# EAGLE board fpga_shield (EAGLE 9.1.2), part 1 of 2
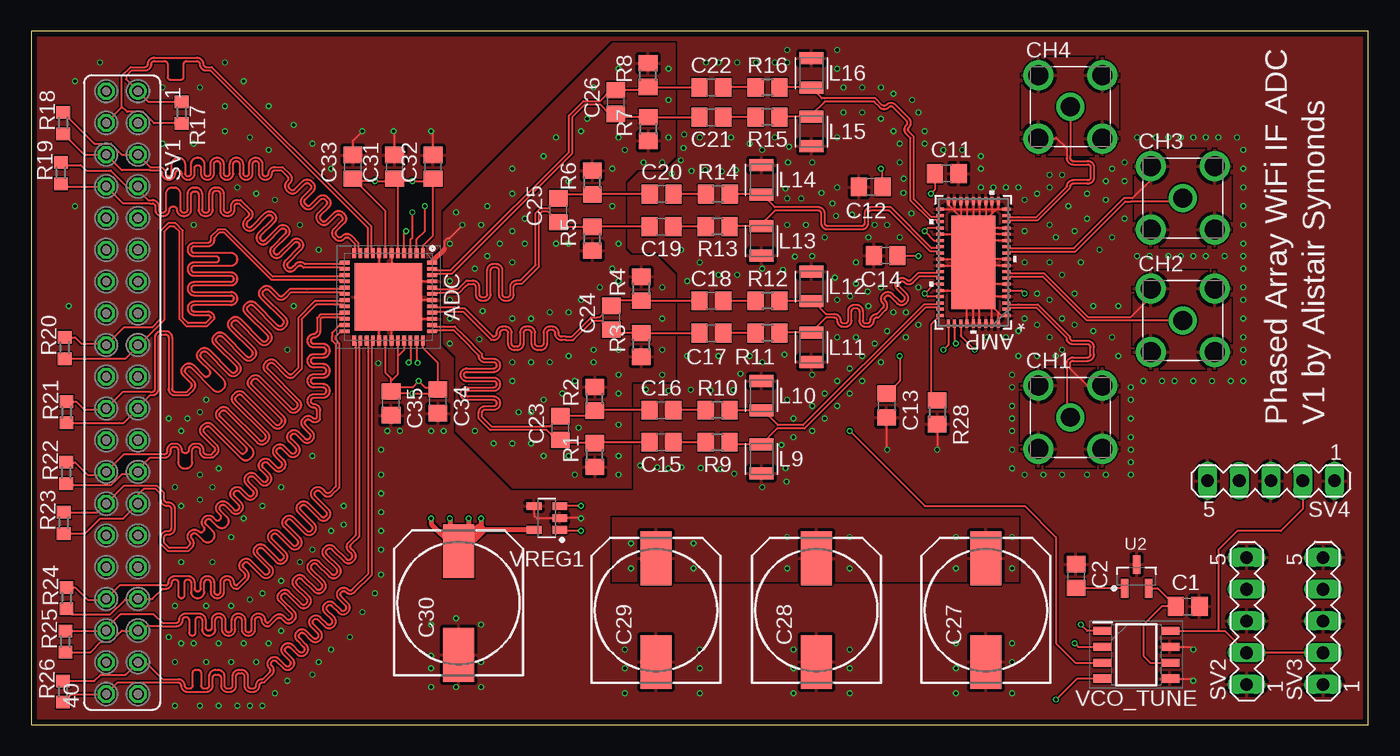
[diagram p0: board, top side]
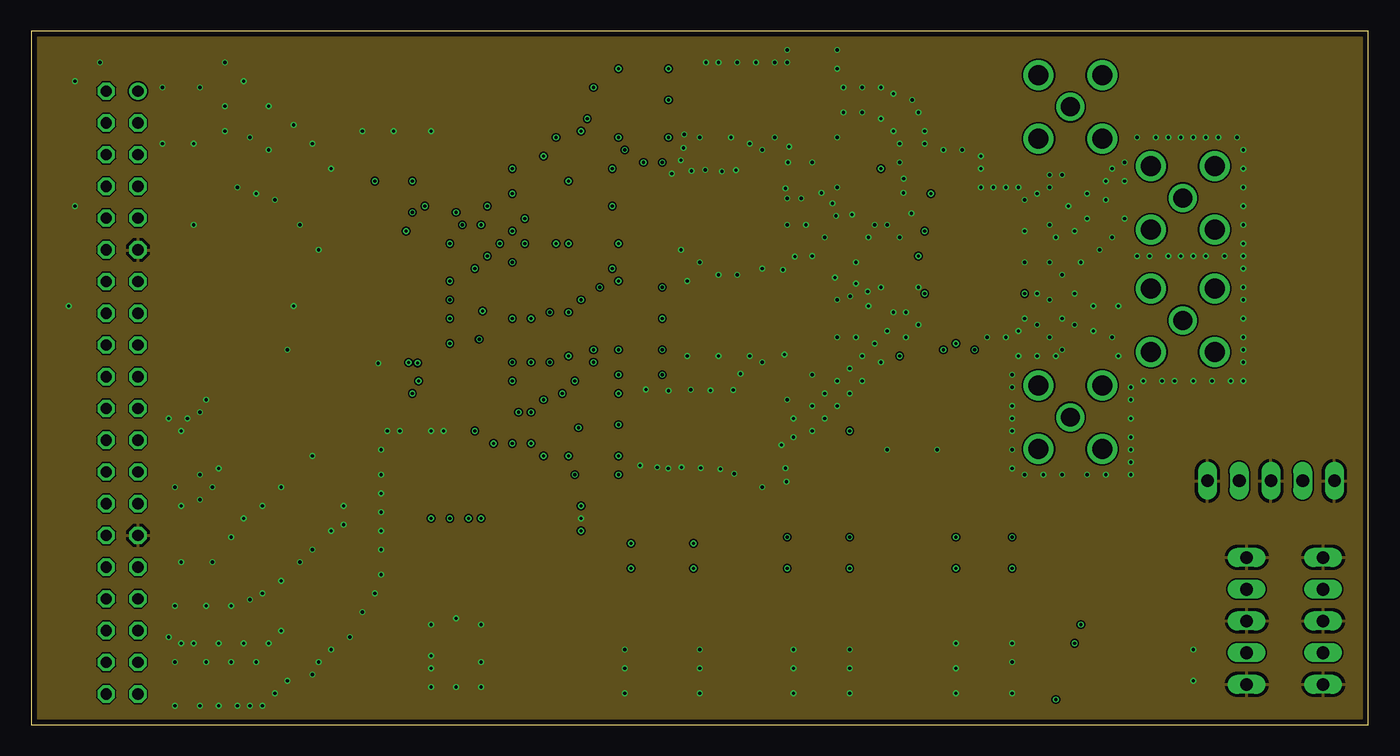
[diagram p1: board, inner layer Route2]
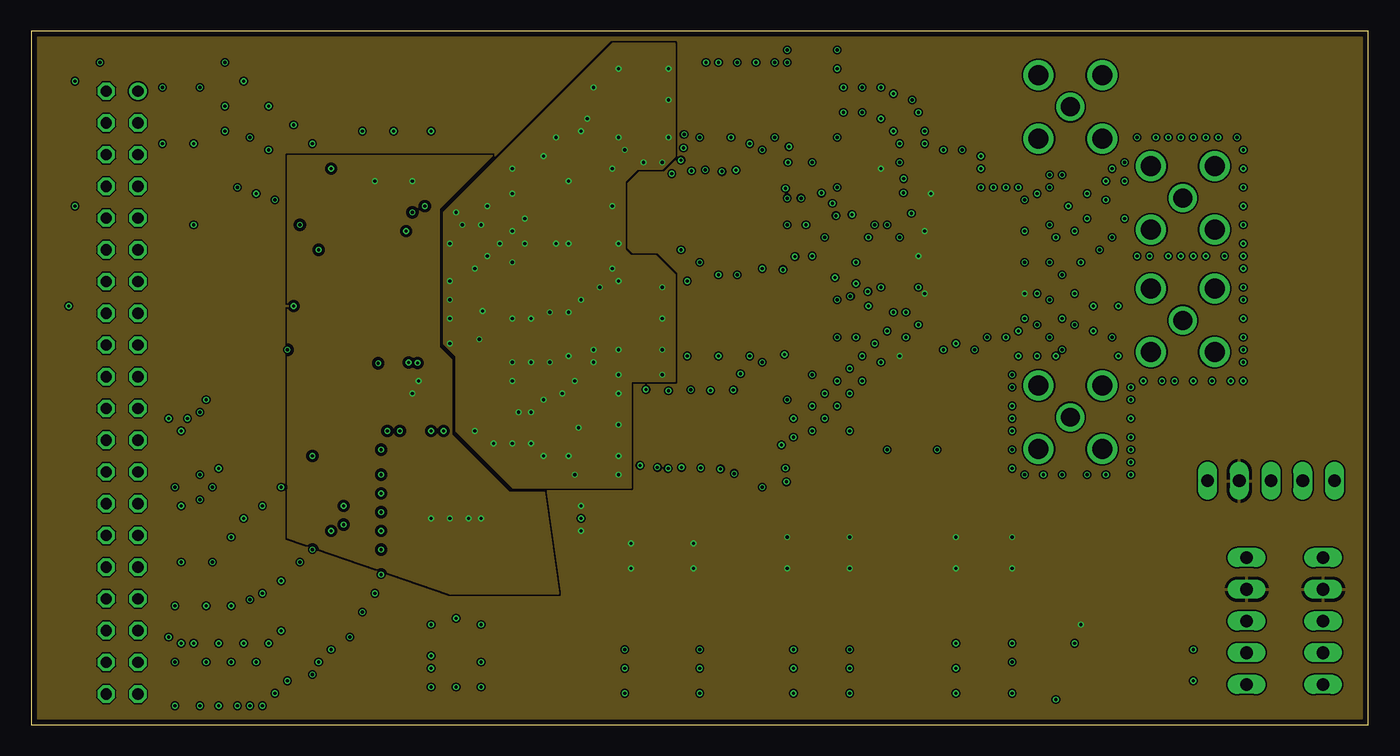
[diagram p2: board, inner layer Route15]
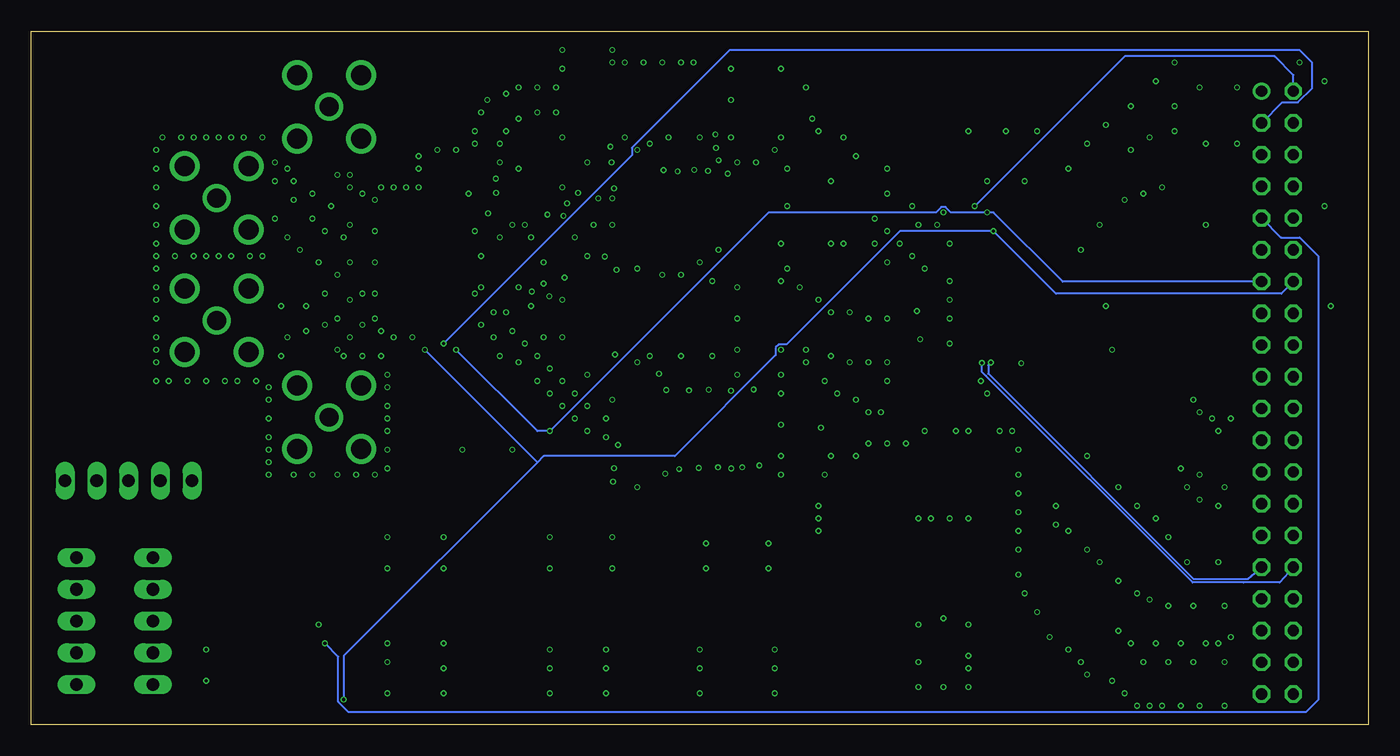
[diagram p3: board, bottom side, seen from below]

Size 107 x 55.5 mm. Coordinates in mm from the lower left corner, seen from the top.
Outline: 0,0 107,0 107,55.5 0,55.5 0,0
Copper layers (1*2*15*16): Top 0.035559375mm / dielectric 0.17018125mm / Route2 0.01778125mm / dielectric 47mil / Route15 0.01778125mm / dielectric 0.17018125mm / Bottom 0.035559375mm
Design rules "oshpark_4layer": minimum track width 5mil, minimum drill 10mil, track to track 5mil, track to pad 5mil, pad to pad 5mil, via to via 5mil, smd to smd 5mil, copper to edge 15mil, drill to drill 6mil, minimum pad ring 4mil, minimum via ring 4mil, stop-mask expansion 2.5mil, vias tented up to drill 0mil, thermal gap 10mil
Net classes: 1 digital_diff: width 0.15 mm; 2 analog_diff: width 0.15 mm

## Footprints (pad centres in the part's own frame; a part is rotated, then mirrored left to right if it is on the bottom)
QFN50P700X700X100-49N = smd 0.8 x 0.3: 1 -3.5,2.75; 2 -3.5,2.25; 3 -3.5,1.75; 4 -3.5,1.25; 5 -3.5,0.75; 6 -3.5,0.25; 7 -3.5,-0.25; 8 -3.5,-0.75; 9 -3.5,-1.25; 10 -3.5,-1.75; 11 -3.5,-2.25; 12 -3.5,-2.75; 25 3.5,-2.75; 26 3.5,-2.25; 27 3.5,-1.75; 28 3.5,-1.25; 29 3.5,-0.75; 30 3.5,-0.25; 31 3.5,0.25; 32 3.5,0.75; 33 3.5,1.25; 34 3.5,1.75; 35 3.5,2.25; 36 3.5,2.75 | smd 0.3 x 0.8: 13 -2.75,-3.5; 14 -2.25,-3.5; 15 -1.75,-3.5; 16 -1.25,-3.5; 17 -0.75,-3.5; 18 -0.25,-3.5; 19 0.25,-3.5; 20 0.75,-3.5; 21 1.25,-3.5; 22 1.75,-3.5; 23 2.25,-3.5; 24 2.75,-3.5; 37 2.75,3.5; 38 2.25,3.5; 39 1.75,3.5; 40 1.25,3.5; 41 0.75,3.5; 42 0.25,3.5; 43 -0.25,3.5; 44 -0.75,3.5; 45 -1.25,3.5; 46 -1.75,3.5; 47 -2.25,3.5; 48 -2.75,3.5 | smd 5.4 x 5.4: 49 0,0
SQA54A = smd 0.61 x 0.254: 1 -2.654,4.25; 2 -2.654,3.75; 3 -2.654,3.25; 4 -2.654,2.75; 5 -2.654,2.25; 6 -2.654,1.75; 7 -2.654,1.25; 8 -2.654,0.75; 9 -2.654,0.25; 10 -2.654,-0.25; 11 -2.654,-0.75; 12 -2.654,-1.25; 13 -2.654,-1.75; 14 -2.654,-2.25; 15 -2.654,-2.75; 16 -2.654,-3.25; 17 -2.654,-3.75; 18 -2.654,-4.25; 28 2.654,-4.25; 29 2.654,-3.75; 30 2.654,-3.25; 31 2.654,-2.75; 32 2.654,-2.25; 33 2.654,-1.75; 34 2.654,-1.25; 35 2.654,-0.75; 36 2.654,-0.25; 37 2.654,0.25; 38 2.654,0.75; 39 2.654,1.25; 40 2.654,1.75; 41 2.654,2.25; 42 2.654,2.75; 43 2.654,3.25; 44 2.654,3.75; 45 2.654,4.25 | smd 0.254 x 0.61: 19 -2,-4.902; 20 -1.5,-4.902; 21 -1,-4.902; 22 -0.5,-4.902; 23 0,-4.902; 24 0.5,-4.902; 25 1,-4.902; 26 1.5,-4.902; 27 2,-4.902; 46 2,4.902; 47 1.5,4.902; 48 1,4.902; 49 0.5,4.902; 50 0,4.902; 51 -0.5,4.902; 52 -1,4.902; 53 -1.5,4.902; 54 -2,4.902 | smd 3.531 x 7.493: 55 0,0
C0805 = smd 1.3 x 1.5: 1 -0.95,0; 2 0.95,0
150CLZ-1010 = smd 4.3 x 2.5: + 4.15,0; - -4.15,0
TE_5-1814832-1 = drill 1.5: 1 0,0 | drill 1.6: 2 -2.54,2.54; 3 2.54,2.54; 4 -2.54,-2.54; 5 2.54,-2.54
INDC2518X180 = smd 0.962 x 1.912: 1 -1.175,0; 2 1.175,0
R0805 = smd 1.3 x 1.5: 1 -0.95,0; 2 0.95,0
R0603 = smd 1 x 1.1: 1 -0.85,0; 2 0.85,0
FE20-2 = drill 0.914: 1 -24.13,1.27 | drill 0.914 octagon: 2 -24.13,-1.27; 3 -21.59,1.27; 4 -21.59,-1.27; 5 -19.05,1.27; 6 -19.05,-1.27; 7 -16.51,1.27; 8 -16.51,-1.27; 9 -13.97,1.27; 10 -13.97,-1.27; 11 -11.43,1.27; 12 -11.43,-1.27; 13 -8.89,1.27; 14 -8.89,-1.27; 15 -6.35,1.27; 16 -6.35,-1.27; 17 -3.81,1.27; 18 -3.81,-1.27; 19 -1.27,1.27; 20 -1.27,-1.27; 21 1.27,1.27; 22 1.27,-1.27; 23 3.81,1.27; 24 3.81,-1.27; 25 6.35,1.27; 26 6.35,-1.27; 27 8.89,1.27; 28 8.89,-1.27; 29 11.43,1.27; 30 11.43,-1.27; 31 13.97,1.27; 32 13.97,-1.27; 33 16.51,1.27; 34 16.51,-1.27; 35 19.05,1.27; 36 19.05,-1.27; 37 21.59,1.27; 38 21.59,-1.27; 39 24.13,1.27; 40 24.13,-1.27
MA05-1 = drill 1.016 long: 1 -5.08,0; 2 -2.54,0; 3 0,0; 4 2.54,0; 5 5.08,0
MICROCHIP_MCP1525T-I-TT_1 = smd 1.5 x 0.6: 1 -0.95,0.95; 2 -0.95,-0.95; 3 0.95,0
SOIC127P600X175-8N = smd 1.5 x 0.65: 1 -2.7,1.905; 2 -2.7,0.635; 3 -2.7,-0.635; 4 -2.7,-1.905; 5 2.7,-1.905; 6 2.7,-0.635; 7 2.7,0.635; 8 2.7,1.905
SOT95P240X110-5 = smd 1.18 x 0.609: 1 -1.024,0.95; 2 -1.024,0; 3 -1.024,-0.95; 4 1.024,-0.95; 5 1.024,0.95

## Placement (x,y rotation side)
ADC  HMCAD1511  [QFN50P700X700X100-49N]  28.59,34.23 270 top
AMP  LMH6522_NJY_54  [SQA54A]  75.39,37 180 top
C1  1uF  [C0805]  92.54,9.46 0 top
C2  0.1uF  [C0805]  83.61,11.89 270 top
C11  0.1uF  [C0805]  73.26,44.11 0 top
C12  0.1uF  [C0805]  67.18,43.04 180 top
C13  0.1uF  [C0805]  68.46,25.53 270 top
C14  0.1uF  [C0805]  68.38,37.54 180 top
C15  0.01u  [C0805]  50.42,22.59 180 top
C16  0.01u  [C0805]  50.42,25.17 180 top
C17  0.01u  [C0805]  54.42,31.34 180 top
C18  0.01u  [C0805]  54.42,33.92 180 top
C19  0.01u  [C0805]  50.42,39.86 180 top
C20  0.01u  [C0805]  50.46,42.46 180 top
C21  0.01u  [C0805]  54.42,48.62 180 top
C22  0.01u  [C0805]  54.42,51 180 top
C23  22pF  [C0805]  42.34,23.73 90 top
C24  22pF  [C0805]  46.42,32.56 90 top
C25  22pF  [C0805]  42.19,41.17 90 top
C26  22pF  [C0805]  46.79,49.82 90 top
C27  1000uF  [150CLZ-1010]  76.4,9.16 90 top
C28  1000uF  [150CLZ-1010]  62.83,9.16 90 top
C29  1000uF  [150CLZ-1010]  50,9.16 90 top
C30  1000uF  [150CLZ-1010]  34.19,9.73 90 top
C31  0.1uF  [C0805]  29.08,44.65 90 top
C32  0.1uF  [C0805]  32.16,44.65 90 top
C33  0.1uF  [C0805]  25.74,44.65 90 top
C34  0.1uF  [C0805]  32.54,25.86 270 top
C35  0.1uF  [C0805]  28.79,25.7 270 top
CH1  5-1814832-1  [TE_5-1814832-1]  83.16,24.59 0 top
CH2  5-1814832-1  [TE_5-1814832-1]  92.16,32.35 0 top
CH3  5-1814832-1  [TE_5-1814832-1]  92.16,42.15 0 top
CH4  5-1814832-1  [TE_5-1814832-1]  83.16,49.45 0 top
L9  1uH  [INDC2518X180]  58.44,21.26 90 top
L10  1uH  [INDC2518X180]  58.44,26.32 270 top
L11  1uH  [INDC2518X180]  62.44,30.19 90 top
L12  1uH  [INDC2518X180]  62.44,35.07 270 top
L13  1uH  [INDC2518X180]  58.44,38.71 90 top
L14  1uH  [INDC2518X180]  58.44,43.61 270 top
L15  1uH  [INDC2518X180]  62.44,47.47 90 top
L16  1uH  [INDC2518X180]  62.44,52.15 270 top
R1  22  [R0805]  45.1,21.58 90 top
R2  22  [R0805]  45.1,26.08 90 top
R3  22  [R0805]  48.83,30.4 90 top
R4  22  [R0805]  48.83,34.9 90 top
R5  22  [R0805]  44.9,38.88 90 top
R6  22  [R0805]  44.9,43.38 90 top
R7  22  [R0805]  49.39,47.67 90 top
R8  22  [R0805]  49.37,51.98 90 top
R9  22  [R0805]  54.92,22.59 180 top
R10  22  [R0805]  54.92,25.17 180 top
R11  22  [R0805]  58.92,31.34 180 top
R12  22  [R0805]  58.92,33.92 180 top
R13  22  [R0805]  54.92,39.86 180 top
R14  22  [R0805]  54.96,42.46 180 top
R15  22  [R0805]  58.92,48.62 180 top
R16  22  [R0805]  58.92,51 180 top
R17  100  [R0603]  12.04,48.98 270 top
R18  100  [R0603]  2.56,48.15 90 top
R19  100  [R0603]  2.37,44.15 90 top
R20  100  [R0603]  2.68,30.15 90 top
R21  100  [R0603]  2.83,24.99 90 top
R22  100  [R0603]  2.8,20.15 90 top
R23  100  [R0603]  2.61,16.15 90 top
R24  100  [R0603]  2.83,10.11 90 top
R25  100  [R0603]  2.73,6.65 90 top
R26  100  [R0603]  2.54,2.65 90 top
R28  2000  [R0805]  72.5,25 270 top
SV1  [FE20-2]  7.27,26.57 270 top
SV2  [MA05-1]  97.27,8.29 90 top
SV3  [MA05-1]  103.39,8.29 90 top
SV4  [MA05-1]  99.21,19.51 180 top
U2  MICROCHIP_MCP1525T-I-TTMICROCHIP_MCP1525T-I-TT_0_1  [MICROCHIP_MCP1525T-I-TT_1]  88.46,11.86 90 top
VCO_TUNE  MCP4921-E_SN  [SOIC127P600X175-8N]  88.43,5.58 0 top
VREG1  TLV75718PDBVR  [SOT95P240X110-5]  41.27,16.53 180 top

## Library data of the parts
ADC = HMCAD1511; ARROW_PART_NUMBER: HMCAD1511; ARROW_PRICE/STOCK: https://www.arrow.com/en/products/hmcad1511/analog-devices; DESCRIPTION: ANALOG DEVICES - HMCAD1511 - ADC, 8BIT, 1GSPS, SPI, QFN-48; HEIGHT: 1mm; MANUFACTURER_NAME: Analog Devices; MANUFACTURER_PART_NUMBER: HMCAD1511
AMP = LMH6522; MANUFACTURER_PART_NUMBER: lmh6522_njy_54; VENDOR: Texas Instruments
C1 C2 C11-C35 = rcl; SPICEPREFIX: C
CH1-CH4 = 5-1814832-1; MANUFACTURER: TE Connectivity; PARTREV: B1; STANDARD: Manufacturer recommendations
L9-L16 = Passives
R1-R26 R28 = rcl; SPICEPREFIX: R
SV1 = con-lsta; OC_FARNELL: unknown; OC_NEWARK: unknown
SV2-SV4 = con-lstb; OC_FARNELL: unknown; OC_NEWARK: unknown
U2 = MCP1525-TT; CIIVA_IDS: 983557; CODE__IPC: SOT23-3; DATASHEET_VERSION: revB, Feb-2005; FOOTPRINT_VARIANT_NAME_0: Level C; FOOTPRINT_VARIANT_NAME_1: Level B; FOOTPRINT_VARIANT_NAME_2: Level A; IMPORTED: yes; IMPORTED_FROM: vault; IMPORT_TS: 1521846197; MF: Microchip; MPN: MCP1525T-I/TT; PACKAGE: SOT-23-TT3; PACKAGE_DESCRIPTION: 3-Lead Plastic Small Outline Transistor (TT) [SOT-23]; PACKAGE_VERSION: revBB, Aug-2009; PREFIX: U; RELEASE_DATE: 1300348616; VAULT_GUID: 0C633425-3565-4664-BF59-D2B283F923EE; VAULT_REVISION: D08F1B2D-F08B-45C4-BEE8-83A8337E46DD
VCO_TUNE = MCP4921-E_SN; ALLIED_NUMBER: 70046155; ALLIED_PRICE/STOCK: http://www.alliedelec.com/microchip-technology-inc-mcp4921-e-sn/70046155/; ARROW_PART_NUMBER: MCP4921-E/SN; ARROW_PRICE/STOCK: https://www.arrow.com/en/products/mcp4921-esn/microchip-technology; DESCRIPTION: Single 12-bit DAC SPI I/F,MCP4921-E/SN; HEIGHT: 1.75mm; MANUFACTURER_NAME: Microchip; MANUFACTURER_PART_NUMBER: MCP4921-E/SN; RS_PART_NUMBER: 0402803P; RS_PRICE/STOCK: http://uk.rs-online.com/web/p/products/0402803P
VREG1 = Tl757p

## Nets
1V8: ADC.1 ADC.5 ADC.7 ADC.30 ADC.32 ADC.33 ADC.36 C30.+ C31.1 C32.1 C33.1 C34.1 C35.1 VREG1.5
3V3_GPIO: SV1.30
5V: AMP.5 AMP.31 AMP.33 AMP.40 AMP.42 C11.1 C12.1 C13.1 C14.1 C27.+ C28.+ C29.+ SV2.4 SV3.4 SV4.4 VCO_TUNE.1 VREG1.1 VREG1.3
5V_GPIO: SV1.12
ADC_IN1_N [analog_diff]: ADC.46 C21.2 C26.1 R7.2
ADC_IN1_P [analog_diff]: ADC.47 C22.2 C26.2 R8.1
ADC_IN2_N [analog_diff]: ADC.43 C19.2 C25.1 R5.2
ADC_IN2_P [analog_diff]: ADC.44 C20.2 C25.2 R6.1
ADC_IN3_N [analog_diff]: ADC.40 C17.2 C24.1 R3.2
ADC_IN3_P [analog_diff]: ADC.41 C18.2 C24.2 R4.1
ADC_IN4_N [analog_diff]: ADC.37 C15.2 C23.1 R1.2
ADC_IN4_P [analog_diff]: ADC.38 C16.2 C23.2 R2.1
ADC_VCM: ADC.48 R1.1 R2.2 R3.1 R4.2 R5.1 R6.2 R7.1 R8.2
AMP2_OA1_N [analog_diff]: AMP.43 L10.2 R10.1
AMP2_OA1_P [analog_diff]: AMP.44 L9.2 R9.1
AMP2_OA2_N [analog_diff]: C16.1 R10.2
AMP2_OA2_P [analog_diff]: C15.1 R9.2
AMP2_OB1_N [analog_diff]: AMP.38 L12.2 R12.1
AMP2_OB1_P [analog_diff]: AMP.39 L11.2 R11.1
AMP2_OB2_N [analog_diff]: C18.1 R12.2
AMP2_OB2_P [analog_diff]: C17.1 R11.2
AMP2_OC1_N [analog_diff]: AMP.34 L14.2 R14.1
AMP2_OC1_P [analog_diff]: AMP.35 L13.2 R13.1
AMP2_OC2_N [analog_diff]: C20.1 R14.2
AMP2_OC2_P [analog_diff]: C19.1 R13.2
AMP2_OD1_N [analog_diff]: AMP.29 L16.2 R16.1
AMP2_OD1_P [analog_diff]: AMP.30 L15.2 R15.1
AMP2_OD2_N [analog_diff]: C22.1 R16.2
AMP2_OD2_P [analog_diff]: C21.1 R15.2
AMP_CS [spi_stuff]: AMP.47 SV1.3
GND: ADC.6 ADC.8 ADC.29 ADC.31 ADC.39 ADC.42 ADC.45 ADC.49 AMP.1 AMP.4 AMP.6 AMP.9 AMP.10 AMP.13 AMP.14 AMP.15 AMP.18 AMP.19 AMP.20 AMP.21 AMP.22 AMP.23 AMP.24 AMP.25 AMP.26 AMP.27 AMP.28 AMP.32 AMP.36 AMP.37 AMP.41 AMP.49 AMP.50 AMP.51 AMP.52 AMP.53 AMP.54 AMP.55 C1.2 C2.1 C11.2 C12.2 C13.2 C14.2 C27.- C28.- C29.- C30.- C31.2 C32.2 C33.2 C34.2 C35.2 L9.1 L10.1 L11.1 L12.1 L13.1 L14.1 L15.1 L16.1 R28.2 SV1.11 SV1.29 SV2.1 SV2.3 SV2.5 SV3.1 SV3.3 SV3.5 SV4.1 SV4.3 SV4.5 U2.3 VCO_TUNE.5 VCO_TUNE.7 VREG1.2 VREG1.4
HMCAD1511_CLK_N [digital_diff]: ADC.34 SV1.31
HMCAD1511_CLK_P [digital_diff]: ADC.35 SV1.32
HMCAD1511_CS [spi_stuff]: ADC.2 SV1.2
HMCAD1511_D1A_N [digital_diff]: ADC.10 R17.1 SV1.1
HMCAD1511_D1A_P [digital_diff]: ADC.9 R17.2 SV1.4
HMCAD1511_D1B_N [digital_diff]: ADC.12 R18.1 SV1.6
HMCAD1511_D1B_P [digital_diff]: ADC.11 R18.2 SV1.5
HMCAD1511_D2A_N [digital_diff]: ADC.14 R19.1 SV1.8
HMCAD1511_D2A_P [digital_diff]: ADC.13 R19.2 SV1.7
HMCAD1511_D2B_N [digital_diff]: ADC.16 R20.1 SV1.17
HMCAD1511_D2B_P [digital_diff]: ADC.15 R20.2 SV1.18
HMCAD1511_D3A_N [digital_diff]: ADC.22 R23.1 SV1.27
HMCAD1511_D3A_P [digital_diff]: ADC.21 R23.2 SV1.28
HMCAD1511_D3B_N [digital_diff]: ADC.24 R24.1 SV1.33
HMCAD1511_D3B_P [digital_diff]: ADC.23 R24.2 SV1.34
HMCAD1511_D4A_N [digital_diff]: ADC.26 R25.1 SV1.35
HMCAD1511_D4A_P [digital_diff]: ADC.25 R25.2 SV1.36
HMCAD1511_D4B_N [digital_diff]: ADC.28 R26.1 SV1.40
HMCAD1511_D4B_P [digital_diff]: ADC.27 R26.2 SV1.37
HMCAD1511_FCLK_N [digital_diff]: ADC.20 R22.1 SV1.25
HMCAD1511_FCLK_P [digital_diff]: ADC.19 R22.2 SV1.26
HMCAD1511_LCLK_N [digital_diff]: ADC.18 R21.1 SV1.21
HMCAD1511_LCLK_P [digital_diff]: ADC.17 R21.2 SV1.22
IF1_N [analog_diff]: AMP.3 CH1.2 CH1.3 CH1.4 CH1.5
IF1_P [analog_diff]: AMP.2 CH1.1
IF2_N [analog_diff]: AMP.8 CH2.2 CH2.3 CH2.4 CH2.5
IF2_P [analog_diff]: AMP.7 CH2.1
IF3_N [analog_diff]: AMP.12 CH3.2 CH3.3 CH3.4 CH3.5
IF3_P [analog_diff]: AMP.11 CH3.1
IF4_N [analog_diff]: AMP.17 CH4.2 CH4.3 CH4.4 CH4.5
IF4_P [analog_diff]: AMP.16 CH4.1
MCP4921_CS [spi_stuff]: SV1.9 VCO_TUNE.2
N$2: AMP.45 R28.1
N$18: C2.2 U2.1
SPI_CLK [spi_stuff]: ADC.4 AMP.48 SV1.14 VCO_TUNE.4
SPI_MOSI [spi_stuff]: ADC.3 AMP.46 SV1.13 VCO_TUNE.3
V_TUNE: SV2.2 SV3.2 SV4.2 VCO_TUNE.8
VREF2-5: C1.1 U2.2 VCO_TUNE.6